# EAGLE board ev_fet_pwrsw (EAGLE 9.1.1)
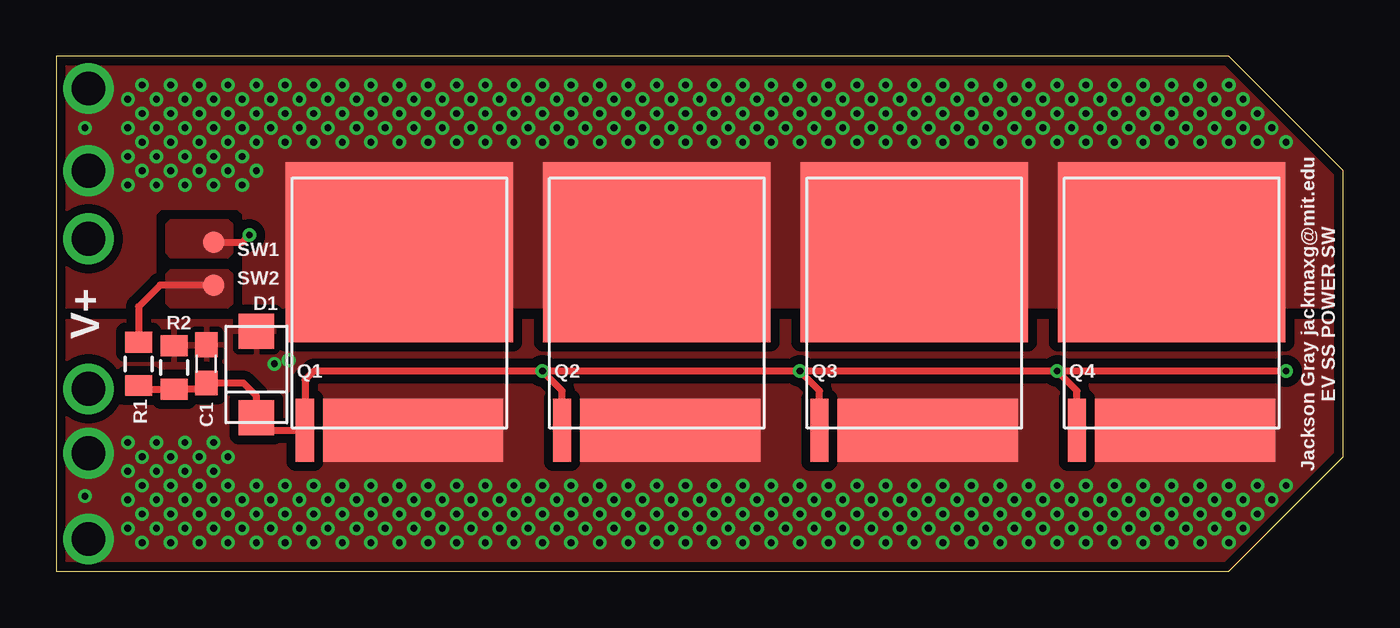
[diagram p0: board, top side]
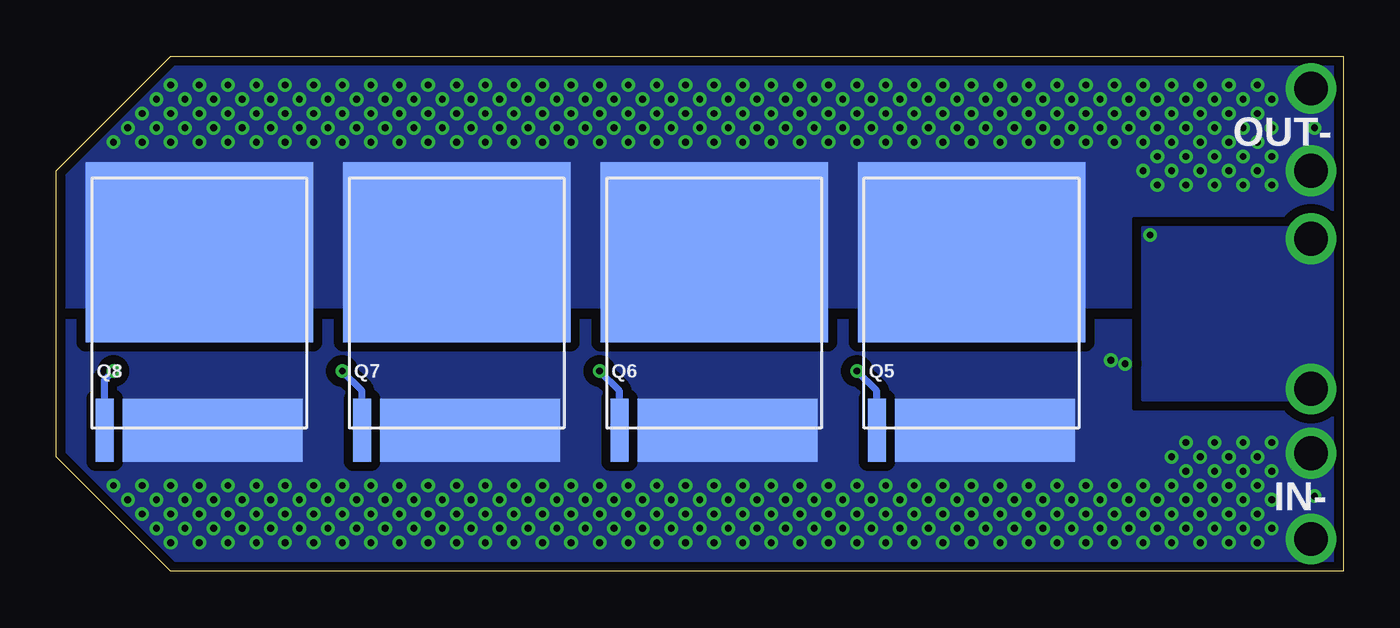
[diagram p1: board, bottom side, seen from below]

Size 57.15 x 22.86 mm. Coordinates in mm from the lower left corner, seen from the top.
Outline: 0,0 52.07,0 57.15,5.08 57.15,17.78 52.07,22.86 0,22.86 0,0
Copper layers (1*16): Top 0.035mm / dielectric 1.5mm / Bottom 0.035mm
Design rules "3PCB_2layer": minimum track width 6mil, minimum drill 0.3mm, track to track 6mil, track to pad 6mil, pad to pad 6mil, via to via 6mil, smd to smd 0mil, copper to edge 6mil, drill to drill 6mil, minimum pad ring 6mil, minimum via ring 6mil, stop-mask expansion 2mil, vias tented up to drill 0.3mm, thermal gap 10mil

## Footprints (pad centres in the part's own frame; a part is rotated, then mirrored left to right if it is on the bottom)
0603 = smd 1.1 x 1: 1 -0.85,0; 2 0.85,0
DO-214AC = smd 1.555 x 1.57: A2 -1.915,0; C1 1.915,0
PG-HSOF-8 = smd 0.8 x 2.8: 1 -4.2,-3.9 | smd 8 x 2.8: 2345678 0.6,-3.9 | smd 10.1 x 8: TAB 0,4
0805 = smd 0.927 x 1.2: 1 -0.964,0; 2 0.964,0
TESTPOINT_PAD = smd 0.953 x 0.953: TP 0,0

## Placement (x,y rotation side)
C1  [0603]  6.67,9.21 90 top
D1  12v  [DO-214AC]  8.89,8.73 270 top
Q1  [PG-HSOF-8]  15.24,10.16 0 top
Q2  [PG-HSOF-8]  26.67,10.16 0 top
Q3  [PG-HSOF-8]  38.1,10.16 0 top
Q4  [PG-HSOF-8]  49.53,10.16 0 top
Q5  [PG-HSOF-8]  16.51,10.16 0 bottom
Q6  [PG-HSOF-8]  27.94,10.16 0 bottom
Q7  [PG-HSOF-8]  39.37,10.16 0 bottom
Q8  [PG-HSOF-8]  50.8,10.16 0 bottom
R1  [0805]  3.65,9.21 270 top
R2  10k  [0805]  5.24,9.05 90 top
SW1  [TESTPOINT_PAD]  6.99,14.61 180 top
SW2  [TESTPOINT_PAD]  6.99,12.7 180 top

## Library data of the parts
C1 R1 R2 = jack_RCL
D1 Q1-Q8 = jack_semi
SW1 SW2 = jack_connector

## Nets
DRAINS: Q1.TAB Q2.TAB Q3.TAB Q4.TAB Q5.TAB Q6.TAB Q7.TAB Q8.TAB
GATES: C1.1 D1.C1 Q1.1 Q2.1 Q3.1 Q4.1 Q5.1 Q6.1 Q7.1 Q8.1 R1.2 R2.1
GND: C1.2 D1.A2 Q1.2345678 Q2.2345678 Q3.2345678 Q4.2345678 Q5.2345678 Q6.2345678 Q7.2345678 Q8.2345678 R2.2
N$1: R1.1 SW2.TP
V+: SW1.TP

## Tracks (layer width: path | path; a pad name or v marks a point on that pad's centre or on a via)
DRAINS  (via drill 0.3, 1.5)
  other vias: 1.43,21.43 1.43,17.78 1.27,19.68 3.81,21.59 3.81,20.32 5.08,20.32 5.08,21.59 4.45,20.95 4.45,19.68 5.71,20.95 5.71,19.68 3.81,19.05 3.81,17.78 5.08,17.78 5.08,19.05 4.45,18.41 4.45,17.14 5.71,18.41 5.71,17.14 3.17,17.14 3.17,18.41 3.17,19.68 3.17,20.95 8.89,17.78 8.89,19.05 10.16,19.05 9.53,19.68 8.89,20.32 8.89,21.59 9.53,20.95 10.16,20.32 10.16,21.59 10.79,20.95 11.43,20.32 10.79,19.68 11.43,19.05 11.43,21.59 6.35,19.05 6.35,17.78 7.62,17.78 7.62,19.05 6.99,18.41 6.99,17.14 8.26,18.41 8.26,17.14 6.35,21.59 6.35,20.32 7.62,20.32 7.62,21.59 6.99,20.95 6.99,19.68 8.26,20.95 8.26,19.68 12.7,20.32 12.7,21.59 12.06,20.95 12.06,19.68 13.34,20.95 13.34,19.68 17.78,20.32 17.78,21.59 17.14,20.95 17.14,19.68 18.41,20.95 18.41,19.68 13.97,19.05 15.24,19.05 14.61,19.68 13.97,20.32 13.97,21.59 14.61,20.95 15.24,20.32 15.24,21.59 15.88,20.95 16.51,20.32 15.88,19.68 16.51,19.05 16.51,21.59 12.7,19.05 19.05,19.05 20.32,19.05 19.68,19.68 19.05,20.32 19.05,21.59 19.68,20.95 20.32,20.32 20.32,21.59 20.95,20.95 21.59,20.32 20.95,19.68 21.59,19.05 21.59,21.59 17.78,19.05 24.13,19.05 25.4,19.05 24.77,19.68 24.13,20.32 24.13,21.59 24.77,20.95 25.4,20.32 25.4,21.59 26.04,20.95 26.67,20.32 26.04,19.68 26.67,19.05 26.67,21.59 22.86,20.32 22.86,21.59 22.23,20.95 22.23,19.68 23.5,20.95 23.5,19.68 22.86,19.05 27.94,20.32 27.94,21.59 27.3,20.95 27.3,19.68 28.57,20.95 28.57,19.68 27.94,19.05 29.21,19.05 30.48,19.05 29.84,19.68 29.21,20.32 29.21,21.59 29.84,20.95 30.48,20.32 30.48,21.59 31.11,20.95 31.75,20.32 31.11,19.68 31.75,19.05 31.75,21.59 33.02,20.32 33.02,21.59 32.38,20.95 32.38,19.68 33.66,20.95 33.66,19.68 33.02,19.05 34.29,19.05 35.56,19.05 34.92,19.68 34.29,20.32 34.29,21.59 34.92,20.95 35.56,20.32 35.56,21.59 36.2,20.95 36.83,20.32 36.2,19.68 36.83,19.05 36.83,21.59 38.1,20.32 38.1,21.59 37.47,20.95 37.47,19.68 38.73,20.95 38.73,19.68 39.37,19.05 40.64,19.05 40.01,19.68 39.37,20.32 39.37,21.59 40.01,20.95 40.64,20.32 40.64,21.59 41.27,20.95 41.91,20.32 41.27,19.68 41.91,19.05 41.91,21.59 38.1,19.05 43.18,20.32 43.18,21.59 42.55,20.95 42.55,19.68 43.81,20.95 43.81,19.68 43.18,19.05 44.45,19.05 45.72,19.05 45.09,19.68 44.45,20.32 44.45,21.59 45.09,20.95 45.72,20.32 45.72,21.59 46.35,20.95 46.99,20.32 46.35,19.68 46.99,19.05 46.99,21.59 48.26,20.32 48.26,21.59 47.62,20.95 47.62,19.68 48.9,20.95 48.9,19.68 48.26,19.05 49.53,19.05 50.8,19.05 50.16,19.68 49.53,20.32 49.53,21.59 50.16,20.95 50.8,20.32 50.8,21.59 51.44,20.95 52.07,20.32 51.44,19.68 52.07,19.05 52.07,21.59 52.7,20.95 53.98,19.68 53.34,19.05 54.61,19.05 53.34,20.32 52.7,19.68
  pour Top (isolate 0.406, rank 3): -2.54,11.75 -2.54,24.13 59.69,24.13 59.69,11.75
  pour Bottom (isolate 0.406, rank 3): -5.08,11.75 -5.08,25.4 62.23,25.4 62.23,11.75
GATES  (via drill 0.3)
  Top 0.305: v54.61,8.89 v44.45,8.89 | v44.45,8.89 v33.02,8.89 | v33.02,8.89 v21.59,8.89 | v21.59,8.89 11.43,8.89 11.04,8.5 Q1.1 9.45,6.26 D1.C1 8.89,7.78 8.31,8.36 C1.1 6.39,8.09 R2.1 3.81,8.09 R1.2 | Q2.1 22.47,8.01 v21.59,8.89 | Q3.1 33.9,8.01 v33.02,8.89 | Q4.1 45.33,8.01 v44.45,8.89
  Bottom 0.305: Q8.1 55,8.5 v54.61,8.89 | Q5.1 20.71,8.01 v21.59,8.89 | Q6.1 32.14,8.01 v33.02,8.89 | Q7.1 43.57,8.01 v44.45,8.89
GND  (via drill 0.3, 1.5)
  other vias: 1.43,1.43 1.43,5.24 10.32,9.37 9.68,9.21 1.27,3.33 3.17,5.71 3.81,5.08 4.45,5.71 3.17,4.45 4.45,4.45 5.08,5.08 5.08,3.81 3.81,3.81 5.71,5.71 6.35,5.08 6.99,5.71 5.71,4.45 6.99,4.45 7.62,5.08 7.62,3.81 6.35,3.81 8.89,3.81 10.16,3.81 11.43,3.81 11.43,2.54 10.16,2.54 8.89,2.54 8.89,1.27 10.16,1.27 11.43,1.27 5.71,3.17 6.35,2.54 6.99,3.17 5.71,1.91 6.99,1.91 7.62,2.54 7.62,1.27 6.35,1.27 8.26,3.17 9.53,3.17 10.79,3.17 10.79,1.91 9.53,1.91 8.26,1.91 12.06,3.17 12.06,1.91 3.17,3.17 3.81,2.54 4.45,3.17 3.17,1.91 4.45,1.91 5.08,2.54 5.08,1.27 3.81,1.27 13.97,3.81 12.7,3.81 16.51,3.81 15.24,3.81 17.78,3.81 19.05,3.81 20.32,3.81 20.32,2.54 19.05,2.54 17.78,2.54 17.78,1.27 19.05,1.27 20.32,1.27 14.61,3.17 15.24,2.54 15.88,3.17 14.61,1.91 15.88,1.91 16.51,2.54 16.51,1.27 15.24,1.27 17.14,3.17 18.41,3.17 19.68,3.17 19.68,1.91 18.41,1.91 17.14,1.91 20.95,3.17 20.95,1.91 12.7,2.54 13.34,3.17 13.34,1.91 13.97,2.54 13.97,1.27 12.7,1.27 22.86,3.81 21.59,3.81 25.4,3.81 24.13,3.81 26.67,3.81 27.94,3.81 29.21,3.81 29.21,2.54 27.94,2.54 26.67,2.54 26.67,1.27 27.94,1.27 29.21,1.27 23.5,3.17 24.13,2.54 24.77,3.17 23.5,1.91 24.77,1.91 25.4,2.54 25.4,1.27 24.13,1.27 26.04,3.17 27.3,3.17 28.57,3.17 28.57,1.91 27.3,1.91 26.04,1.91 29.84,3.17 29.84,1.91 21.59,2.54 22.23,3.17 22.23,1.91 22.86,2.54 22.86,1.27 21.59,1.27 31.75,3.81 30.48,3.81 34.29,3.81 33.02,3.81 35.56,3.81 36.83,3.81 38.1,3.81 38.1,2.54 36.83,2.54 35.56,2.54 35.56,1.27 36.83,1.27 38.1,1.27 32.38,3.17 33.02,2.54 33.66,3.17 32.38,1.91 33.66,1.91 34.29,2.54 34.29,1.27 33.02,1.27 34.92,3.17 36.2,3.17 37.47,3.17 37.47,1.91 36.2,1.91 34.92,1.91 38.73,3.17 38.73,1.91 30.48,2.54 31.11,3.17 31.11,1.91 31.75,2.54 31.75,1.27 30.48,1.27 40.64,3.81 39.37,3.81 43.18,3.81 41.91,3.81 44.45,3.81 45.72,3.81 46.99,3.81 46.99,2.54 45.72,2.54 44.45,2.54 44.45,1.27 45.72,1.27 46.99,1.27 41.27,3.17 41.91,2.54 42.55,3.17 41.27,1.91 42.55,1.91 43.18,2.54 43.18,1.27 41.91,1.27 43.81,3.17 45.09,3.17 46.35,3.17 46.35,1.91 45.09,1.91 43.81,1.91 47.62,3.17 47.62,1.91 39.37,2.54 40.01,3.17 40.01,1.91 40.64,2.54 40.64,1.27 39.37,1.27 48.9,3.17 50.16,3.17 52.7,3.17 51.44,3.17 53.98,3.17 52.7,1.91 51.44,1.91 48.26,1.27 49.53,1.27 50.8,1.27 52.07,1.27 53.34,2.54 54.61,3.81 53.34,3.81 52.07,3.81 50.8,3.81 49.53,3.81 48.26,3.81 48.26,2.54 49.53,2.54 50.8,2.54 52.07,2.54 50.16,1.91 48.9,1.91
  pour Top (isolate 0.406, rank 3): -1.27,11.11 58.42,11.11 58.42,-1.27 -1.27,-1.27
  pour Bottom (isolate 0.406, rank 3): -3.81,11.11 -3.81,-2.54 60.96,-2.54 60.96,11.11
N$1
  Top 0.305: SW2.TP 4.6,12.7 3.65,11.75 R1.1
  pour Top (isolate 0.406): 7.62,13.34 7.78,13.18 7.78,11.91 7.62,11.75 5.08,11.75 4.92,11.91 4.92,13.18 5.08,13.34
V+  (via drill 0.3, 1.5)
  Top 0.305: SW1.TP 8.26,14.61 v8.57,14.92
  other vias: 1.43,14.76 1.43,8.1
  pour Bottom (isolate 0.406): -1.27,7.62 8.89,7.62 8.89,15.24 -1.27,15.24
  pour Top (isolate 0.406): 7.62,15.56 7.78,15.4 7.78,14.13 7.62,13.97 5.08,13.97 4.92,14.13 4.92,15.4 5.08,15.56

## Text on the board
tPlace: V+ | Jackson Gray jackmaxg@mit.edu / EV SS POWER SW
bPlace: OUT- | IN-